# EAGLE board Fake6509_v3 (EAGLE 7.7.0)
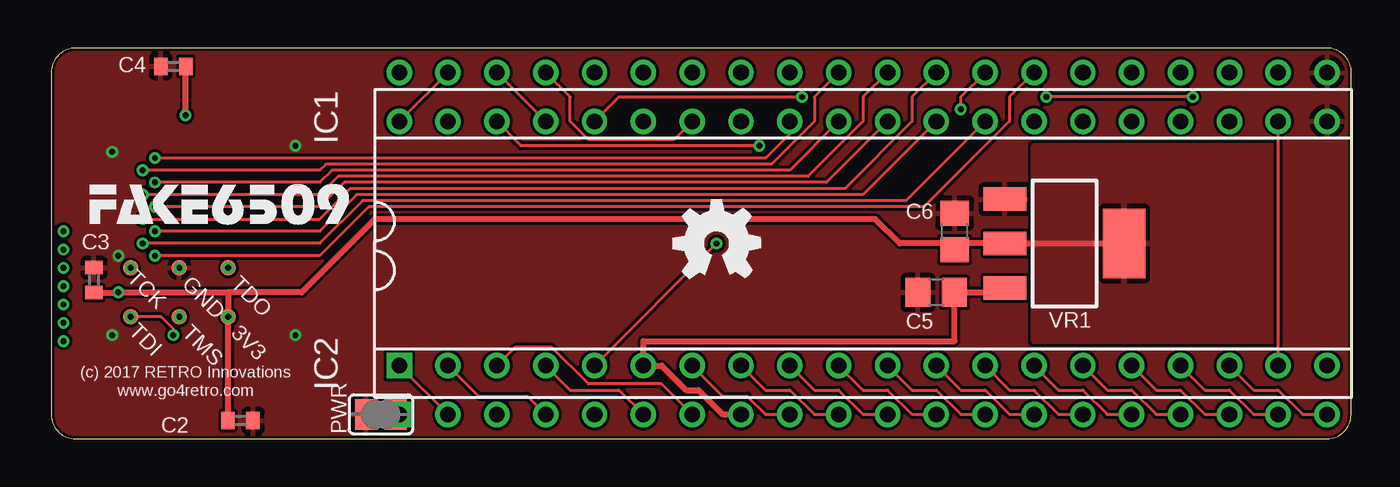
[diagram p0: board, top side]
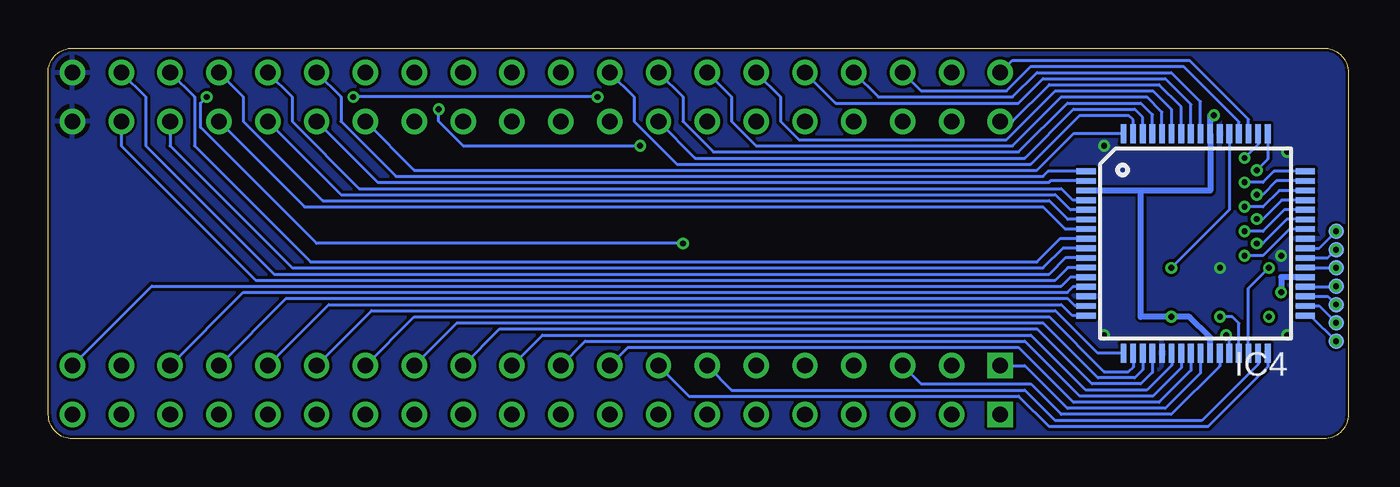
[diagram p1: board, bottom side, seen from below]

Size 67.63 x 20.32 mm. Coordinates in mm from the lower left corner, seen from the top.
Outline: 0,19.05 0,1.27 arc90 1.27,0 66.34,0 arc90 67.61,1.27 67.63,19.05 arc90 66.36,20.32 1.27,20.32 arc90 0,19.05
Copper layers (1*16): Top 0.035mm / dielectric 1.5mm / Bottom 0.035mm
Design rules "hackvana *": minimum track width 6mil, minimum drill 0.3mm, track to track 6mil, track to pad 6mil, pad to pad 6mil, via to via 6mil, smd to smd 0mil, copper to edge 6mil, drill to drill 6mil, minimum pad ring 10mil, minimum via ring 6mil, stop-mask expansion 2mil, vias tented up to drill 100mil, thermal gap 10mil

## Footprints (pad centres in the part's own frame; a part is rotated, then mirrored left to right if it is on the bottom)
TP08R = smd 0.8 x 0.8: TP 0,0
C0402 = smd 0.7 x 0.9: 1 -0.65,0; 2 0.65,0
C0805 = smd 1.3 x 1.5: 1 -0.95,0; 2 0.95,0
DIL40-ROUNDPAD = drill 0.813 square: 1 -24.13,-7.62 | drill 0.813: 2 -21.59,-7.62; 3 -19.05,-7.62; 4 -16.51,-7.62; 5 -13.97,-7.62; 6 -11.43,-7.62; 7 -8.89,-7.62; 8 -6.35,-7.62; 9 -3.81,-7.62; 10 -1.27,-7.62; 11 1.27,-7.62; 12 3.81,-7.62; 13 6.35,-7.62; 14 8.89,-7.62; 15 11.43,-7.62; 16 13.97,-7.62; 17 16.51,-7.62; 18 19.05,-7.62; 19 21.59,-7.62; 20 24.13,-7.62; 21 24.13,7.62; 22 21.59,7.62; 23 19.05,7.62; 24 16.51,7.62; 25 13.97,7.62; 26 11.43,7.62; 27 8.89,7.62; 28 6.35,7.62; 29 3.81,7.62; 30 1.27,7.62; 31 -1.27,7.62; 32 -3.81,7.62; 33 -6.35,7.62; 34 -8.89,7.62; 35 -11.43,7.62; 36 -13.97,7.62; 37 -16.51,7.62; 38 -19.05,7.62; 39 -21.59,7.62; 40 -24.13,7.62
VQFP64 = smd 1 x 0.3: 1 -5.7,3.75; 2 -5.7,3.25; 3 -5.7,2.75; 4 -5.7,2.25; 5 -5.7,1.75; 6 -5.7,1.25; 7 -5.7,0.75; 8 -5.7,0.25; 9 -5.7,-0.25; 10 -5.7,-0.75; 11 -5.7,-1.25; 12 -5.7,-1.75; 13 -5.7,-2.25; 14 -5.7,-2.75; 15 -5.7,-3.25; 16 -5.7,-3.75; 33 5.7,-3.75; 34 5.7,-3.25; 35 5.7,-2.75; 36 5.7,-2.25; 37 5.7,-1.75; 38 5.7,-1.25; 39 5.7,-0.75; 40 5.7,-0.25; 41 5.7,0.25; 42 5.7,0.75; 43 5.7,1.25; 44 5.7,1.75; 45 5.7,2.25; 46 5.7,2.75; 47 5.7,3.25; 48 5.7,3.75 | smd 0.3 x 1: 17 -3.75,-5.7; 18 -3.25,-5.7; 19 -2.75,-5.7; 20 -2.25,-5.7; 21 -1.75,-5.7; 22 -1.25,-5.7; 23 -0.75,-5.7; 24 -0.25,-5.7; 25 0.25,-5.7; 26 0.75,-5.7; 27 1.25,-5.7; 28 1.75,-5.7; 29 2.25,-5.7; 30 2.75,-5.7; 31 3.25,-5.7; 32 3.75,-5.7; 49 3.75,5.7; 50 3.25,5.7; 51 2.75,5.7; 52 2.25,5.7; 53 1.75,5.7; 54 1.25,5.7; 55 0.75,5.7; 56 0.25,5.7; 57 -0.25,5.7; 58 -0.75,5.7; 59 -1.25,5.7; 60 -1.75,5.7; 61 -2.25,5.7; 62 -2.75,5.7; 63 -3.25,5.7; 64 -3.75,5.7
SJ = smd 1.168 x 1.6: 1 -0.762,0; 2 0.762,0
SOT223 = smd 1.219 x 2.235: 1 -2.311,-3.099; 2 0,-3.099; 3 2.311,-3.099 | smd 3.6 x 2.2: 4 0,3.099

## Placement (x,y rotation side)
3V3  PTR1TP08R  [TP08R]  9.21,6.35 0 top
C2  .1  [C0402]  9.84,0.95 0 top
C3  .1  [C0402]  2.22,8.26 90 top
C4  .1  [C0402]  6.35,19.37 180 top
C5  10  [C0805]  46.04,7.62 180 top
C6  22  [C0805]  46.99,10.79 90 top
GND  PTR1TP08R  [TP08R]  6.67,8.89 0 top
GOLD_ORB_SM1  Open Source Hardware  [OSHW_5MM]  34.61,10.16 0 top
IC1  6509  [DIL40-ROUNDPAD]  42.23,11.43 0 top
IC2  65(C)02  [DIL40-ROUNDPAD]  42.23,8.89 0 top
IC4  XC9572XL  [VQFP64]  7.94,10.16 0 bottom
PWR  [SJ]  17.15,1.27 180 top
TCK  PTR1TP08R  [TP08R]  4.13,8.89 0 top
TDI  PTR1TP08R  [TP08R]  4.13,6.35 0 top
TDO  PTR1TP08R  [TP08R]  9.21,8.89 0 top
TEST0  PTR1TP08R  [TP08R]  0.64,10.79 0 bottom
TEST1  PTR1TP08R  [TP08R]  0.64,9.84 0 bottom
TEST2  PTR1TP08R  [TP08R]  0.64,8.89 0 bottom
TEST3  PTR1TP08R  [TP08R]  0.64,7.94 0 bottom
TEST4  PTR1TP08R  [TP08R]  0.64,6.99 0 bottom
TEST5  PTR1TP08R  [TP08R]  0.64,6.03 0 bottom
TEST6  PTR1TP08R  [TP08R]  0.64,5.08 0 bottom
TMS  PTR1TP08R  [TP08R]  6.67,6.35 0 top
VR1  [SOT223]  52.7,10.16 270 top

## Library data of the parts
3V3 GND TCK TDI TDO TEST0 TEST1-TEST6 TMS = testpad
C2-C6 = rcl
GOLD_ORB_SM1 = oshw
IC1 IC2 = commodore
IC4 = xilinx_xc95XXXxl
PWR = jumper
VR1 = SparkFun

## Nets
6502_A13: IC2.23 IC4.9
6502_A14: IC2.24 IC4.7
6502_A15: IC2.25 IC4.5
6502_D0: IC2.33 IC4.62
6502_D1: IC2.32 IC4.50
6502_D2: IC2.31 IC4.48
6502_D3: IC2.30 IC4.46
6502_D4: IC2.29 IC4.44
6502_D5: IC2.28 IC4.43
6502_D6: IC2.27 IC4.64
6502_D7: IC2.26 IC4.2
6502_PHI2O: IC2.39
6509_A13: IC1.20 IC4.12
6509_A14: IC1.22 IC4.10
6509_A15: IC1.23 IC4.8
6509_D0: IC1.36 IC4.57
6509_D1: IC1.35 IC4.59
6509_D2: IC1.34 IC4.60
6509_D3: IC1.33 IC4.61
6509_D4: IC1.32 IC4.63
6509_D5: IC1.31 IC4.49
6509_D6: IC1.30 IC4.47
6509_D7: IC1.29 IC4.45
6509_PHI1I: IC1.40 IC4.51
6509_PHI2I: IC1.38 IC2.37 IC4.52
!IRQ: IC1.2 IC2.4
!NMI: IC1.4 IC2.6
!RDY: IC1.1 IC2.2 IC4.25
!RESET: IC1.39 IC2.40 IC4.58
!SO: IC1.28 IC2.38
+3V3: 3V3.TP C2.1 C3.1 C4.1 C6.1 IC4.3 IC4.26 IC4.37 IC4.55 VR1.2 VR1.4
A0: IC1.7 IC2.9 IC4.31
A1: IC1.8 IC2.10 IC4.32
A2: IC1.9 IC2.11 IC4.24
A3: IC1.10 IC2.12 IC4.23
A4: IC1.11 IC2.13 IC4.22
A5: IC1.12 IC2.14 IC4.20
A6: IC1.13 IC2.15 IC4.19
A7: IC1.14 IC2.16 IC4.18
A8: IC1.15 IC2.17 IC4.17
A9: IC1.16 IC2.18 IC4.16
A10: IC1.17 IC2.19 IC4.15
A11: IC1.18 IC2.20 IC4.13
A12: IC1.19 IC2.22 IC4.11
AEC: IC1.5 IC2.36
GND: C2.2 C3.2 C4.2 C5.2 C6.2 GND.TP IC1.21 IC2.21 IC4.14 IC4.21 IC4.41 IC4.54 PWR.2 VR1.1
N$8: IC2.1 PWR.1
P0: IC1.27 IC4.42
P1: IC1.26 IC4.1
P2: IC1.25 IC4.4
P3: IC1.24 IC4.6
R/!W: IC1.37 IC2.34 IC4.56
SYNC: IC1.3 IC2.7 IC4.27
TCK: IC4.30 TCK.TP
TDI: IC4.28 TDI.TP
TDO: IC4.53 TDO.TP
TEST0: IC4.40 TEST0.TP
TEST1: IC4.39 TEST1.TP
TEST2: IC4.38 TEST2.TP
TEST3: IC4.36 TEST3.TP
TEST4: IC4.35 TEST4.TP
TEST5: IC4.34 TEST5.TP
TEST6: IC4.33 TEST6.TP
TMS: IC4.29 TMS.TP
VCC: C5.1 IC1.6 IC2.8 VR1.3

## Tracks (layer width: path | path; a pad name or v marks a point on that pad's centre or on a via)
6502_A13
  Bottom 0.152: IC2.23 61.28,15.24 54.93,8.89 15.87,8.89 14.85,9.91 IC4.9
6502_A14
  Bottom 0.152: IC2.24 54.29,12.06 15.87,12.06 14.72,10.91 IC4.7
6502_A15
  Bottom 0.152: IC2.25 52.39,12.7 15.24,12.7 14.45,11.91 IC4.5
6502_D0
  Bottom 0.152: IC2.33 33.97,14.61 16.83,14.61 14.29,17.14 11.11,17.14 10.69,16.72 IC4.62
6502_D1  (via drill 0.3)
  Top 0.152: IC2.32 38.42,15.88 37.15,14.61 v5.4,14.61
  Bottom 0.152: IC4.50 4.69,15.32 v5.4,14.61
6502_D2  (via drill 0.3)
  Top 0.152: IC2.31 38.42,13.97 14.6,13.97 13.97,13.34 v5.4,13.34
  Bottom 0.152: IC4.48 3.87,13.91 4.44,13.34 v5.4,13.34
6502_D3  (via drill 0.3)
  Top 0.152: IC2.30 40.32,13.34 15.24,13.34 13.97,12.06 v5.4,12.06
  Bottom 0.152: IC4.46 3.6,12.91 4.44,12.06 v5.4,12.06
6502_D4  (via drill 0.3)
  Top 0.152: IC2.29 42.23,12.7 15.87,12.7 13.97,10.79 v5.4,10.79
  Bottom 0.152: IC4.44 3.33,11.91 4.44,10.79 v5.4,10.79
6502_D5  (via drill 0.3)
  Top 0.152: IC2.28 44.45,12.38 16.19,12.38 13.97,10.16 v4.76,10.16
  Bottom 0.152: IC4.43 3.19,11.41 4.44,10.16 v4.76,10.16
6502_D6
  Bottom 0.152: IC2.27 48.58,13.97 16.19,13.97 14.3,15.86 IC4.64
6502_D7
  Bottom 0.152: IC2.26 50.48,13.34 15.56,13.34 15.48,13.41 IC4.2
6509_A13
  Bottom 0.152: IC1.20 62.23,7.94 14.92,7.94 14.45,8.41 IC4.12
6509_A14
  Bottom 0.152: IC1.22 62.55,17.78 62.55,15.24 55.88,8.57 15.56,8.57 14.72,9.41 IC4.10
6509_A15
  Bottom 0.152: IC1.23 60.01,17.78 60.01,15.24 53.97,9.21 16.19,9.21 14.99,10.41 IC4.8
6509_D0
  Bottom 0.152: IC1.36 26.67,17.46 17.15,17.46 15.87,18.73 9.53,18.73 8.19,17.39 IC4.57
6509_D1
  Bottom 0.152: IC1.35 29.53,17.78 29.53,16.51 28.58,15.56 17.78,15.56 15.24,18.1 10.16,18.1 9.19,17.12 IC4.59
6509_D2
  Bottom 0.152: IC1.34 32.07,17.78 32.07,16.51 30.8,15.24 17.46,15.24 14.92,17.78 10.48,17.78 9.69,16.99 IC4.60
6509_D3
  Bottom 0.152: IC1.33 34.61,17.78 34.61,16.51 33.02,14.92 17.15,14.92 14.6,17.46 10.8,17.46 10.19,16.86 IC4.61
6509_D4
  Bottom 0.152: IC1.32 37.15,17.78 37.15,16.51 34.93,14.29 16.51,14.29 13.97,16.83 11.43,16.83 11.19,16.59 IC4.63
6509_D5  (via drill 0.3)
  Top 0.152: IC1.31 39.69,17.78 39.69,16.51 37.46,14.29 14.29,14.29 13.97,13.97 v4.76,13.97
  Bottom 0.152: IC4.49 4.19,14.54 v4.76,13.97
6509_D6  (via drill 0.3)
  Top 0.152: IC1.30 42.23,17.78 42.23,16.51 39.37,13.65 14.92,13.65 13.97,12.7 v4.76,12.7
  Bottom 0.152: IC4.47 3.74,13.41 4.44,12.7 v4.76,12.7
6509_D7  (via drill 0.3)
  Top 0.152: IC1.29 44.77,17.78 44.77,16.51 41.28,13.02 15.56,13.02 13.97,11.43 v4.76,11.43
  Bottom 0.152: IC4.45 3.47,12.41 4.44,11.43 v4.76,11.43
6509_PHI1I
  Bottom 0.152: IC1.40 17.46,19.69 8.26,19.69 5.19,16.62 IC4.51
6509_PHI2I
  Top 0.152: IC1.38 IC2.37
  Bottom 0.152: IC1.38 22.22,18.1 17.78,18.1 16.51,19.37 8.57,19.37 5.69,16.48 IC4.52
!IRQ
  Top 0.152: IC1.2 22.22,2.22 24.77,2.22 IC2.4
!NMI
  Top 0.152: IC1.4 26.99,2.54 29.53,2.54 IC2.6
!RDY
  Top 0.152: IC1.1 IC2.2
  Bottom 0.152: IC1.1 16.83,3.81 14.6,1.59 9.53,1.59 7.69,3.42 IC4.25
!RESET
  Top 0.152: IC1.39 IC2.40
  Bottom 0.152: IC2.40 17.46,16.51 15.56,18.41 9.84,18.41 8.69,17.26 IC4.58
!SO  (via drill 0.3)
  Top 0.152: v36.83,15.24 24.45,15.24 IC2.38 | v47.31,17.14 47.31,17.78 IC1.28
  Bottom 0.152: v36.83,15.24 46.04,15.24 47.31,16.51 v47.31,17.14
+3V3  (via drill 0.3)
  Top 0.305: 9.21,7.62 v3.49,7.62 3.49,7.61 C3.1 | 9.21,7.62 3V3.TP C2.1 | v6.99,16.83 6.99,19.37 C4.1 | VR1.4 VR1.2 46.99,10.16 | 9.21,7.62 13.02,7.62 16.83,11.43 42.86,11.43 44.13,10.16 46.99,10.16 | 46.99,10.16 C6.1
  Bottom 0.305: IC4.37 3.49,8.41 v3.49,7.62 | 10.8,12.91 7.19,12.91 IC4.55 7.19,16.83 v6.99,16.83 | 10.8,12.91 IC4.3 | 10.8,12.91 10.8,6.35 3V3.TP 8.26,6.35 7.19,5.28 IC4.26
  other vias: 9.21,6.35
  pour Top: 51.12,15.24 63.5,15.24 63.5,5.08 51.12,5.08
A0
  Top 0.152: IC1.7 34.93,2.22 36.19,2.22 37.15,1.27 IC2.9
  Bottom 0.152: IC1.7 32.07,2.54 16.83,2.54 15.24,0.95 7.62,0.95 4.69,3.88 IC4.31
A1
  Top 0.152: IC1.8 37.15,2.54 38.42,2.54 39.69,1.27 IC2.10
  Bottom 0.152: IC1.8 34.29,2.22 17.15,2.22 15.56,0.63 7.3,0.63 4.19,3.75 IC4.32
A2
  Top 0.152: IC1.9 39.69,2.54 40.96,2.54 42.23,1.27 IC2.11
  Bottom 0.152: IC1.9 37.46,4.76 17.15,4.76 14.29,1.9 9.84,1.9 8.19,3.56 IC4.24
A3
  Top 0.152: IC1.10 42.23,2.54 43.5,2.54 44.77,1.27 IC2.12
  Bottom 0.152: IC1.10 39.69,5.08 16.83,5.08 13.97,2.22 10.16,2.22 8.69,3.7 IC4.23
A4
  Top 0.152: IC1.11 44.77,2.54 46.04,2.54 47.31,1.27 IC2.13
  Bottom 0.152: IC1.11 41.91,5.4 16.51,5.4 13.65,2.54 10.48,2.54 9.19,3.83 IC4.22
A5
  Top 0.152: IC1.12 47.31,2.54 48.58,2.54 49.85,1.27 IC2.14
  Bottom 0.152: IC1.12 44.13,5.71 16.19,5.71 13.33,2.86 10.8,2.86 10.19,3.46 IC4.20
A6
  Top 0.152: IC1.13 49.85,2.54 51.12,2.54 52.39,1.27 IC2.15
  Bottom 0.152: IC1.13 46.36,6.03 15.87,6.03 13.02,3.17 11.11,3.17 10.69,3.6 IC4.19
A7
  Top 0.152: IC1.14 52.39,2.54 53.66,2.54 54.93,1.27 IC2.16
  Bottom 0.152: IC1.14 48.58,6.35 15.56,6.35 12.7,3.49 11.43,3.49 11.19,3.74 IC4.18
A8
  Top 0.152: IC1.15 54.93,2.54 56.2,2.54 57.47,1.27 IC2.17
  Bottom 0.152: IC1.15 50.8,6.67 15.24,6.67 13.03,4.46 IC4.17
A9
  Top 0.152: IC1.16 57.47,2.54 58.74,2.54 60.01,1.27 IC2.18
  Bottom 0.152: IC1.16 53.02,6.99 14.92,6.99 14.35,6.41 IC4.16
A10
  Top 0.152: IC1.17 60.01,2.54 61.28,2.54 62.55,1.27 IC2.19
  Bottom 0.152: IC1.17 55.24,7.3 14.6,7.3 14.21,6.91 IC4.15
A11
  Top 0.152: IC1.18 62.55,2.54 63.82,2.54 65.09,1.27 IC2.20
  Bottom 0.152: IC1.18 57.47,7.62 14.6,7.62 14.31,7.91 IC4.13
A12
  Top 0.152: IC1.19 IC2.22
  Bottom 0.152: IC2.22 63.82,15.24 56.83,8.26 15.24,8.26 14.58,8.91 IC4.11
AEC  (via drill 0.3)
  Top 0.152: IC2.36 29.53,17.78 v39.05,17.78 | IC1.5 v34.61,10.16 | v59.37,17.78 v51.75,17.78
  Bottom 0.152: v34.61,10.16 53.66,10.16 59.69,16.19 59.69,17.46 v59.37,17.78 | v39.05,17.78 v51.75,17.78
GND  (via drill 0.3)
  other vias: 6.67,8.89 12.7,5.4 3.18,5.4 3.18,14.92 12.7,15.24 3.49,9.53
  pour Top (rank 2): 1.27,20.32 66.36,20.32 arc-90 67.63,19.05 67.63,1.27 arc-90 66.36,0 1.27,0 arc-90 0,1.27 0,19.05 arc-90
  pour Bottom (rank 2): 1.27,20.32 66.36,20.32 arc-90 67.63,19.05 67.63,1.27 arc-90 66.36,0 1.27,0 arc-90 0,1.27 0,19.05 arc-90
N$8
  Top 0.152: PWR.1 IC2.1
P0  (via drill 0.3)
  Top 0.152: IC1.27 49.85,17.78 49.85,16.51 45.4,12.06 16.51,12.06 13.97,9.53 v5.4,9.53
  Bottom 0.152: IC4.42 3.06,10.91 4.44,9.53 v5.4,9.53
P1
  Bottom 0.152: IC1.26 52.39,17.78 52.39,16.51 49.53,13.65 15.87,13.65 15.62,13.91 IC4.1
P2
  Bottom 0.152: IC1.25 54.93,17.78 54.93,16.51 51.44,13.02 14.92,13.02 14.31,12.41 IC4.4
P3
  Bottom 0.152: IC1.24 57.47,17.78 57.47,16.51 53.34,12.38 15.56,12.38 14.58,11.41 IC4.6
R/!W
  Top 0.152: IC2.34 32.38,15.56 27.94,15.56 26.99,16.51 26.99,17.78 IC1.37
  Bottom 0.152: IC1.37 24.45,17.78 17.46,17.78 16.19,19.05 9.21,19.05 7.69,17.53 IC4.56
SYNC
  Top 0.152: IC2.7 31.75,2.86 27.94,2.86 26.04,4.76 24.13,4.76 IC1.3
  Bottom 0.152: IC1.3 22.22,2.86 16.51,2.86 14.92,1.27 9.21,1.27 6.69,3.79 IC4.27
TCK  (via drill 0.3)
  Bottom 0.152: IC4.30 5.19,7.83 TCK.TP
  other vias: 4.13,8.89
TDI  (via drill 0.3)
  Top 0.152: v6.35,5.4 6.35,5.71 5.72,6.35 TDI.TP
  Bottom 0.152: IC4.28 6.19,5.24 v6.35,5.4
  other vias: 4.13,6.35
TDO  (via drill 0.3)
  Bottom 0.152: IC4.53 6.19,11.91 TDO.TP
  other vias: 9.21,8.89
TEST0  (via drill 0.3)
  Bottom 0.152: IC4.40 1.52,9.91 TEST0.TP
  other vias: 0.64,10.79
TEST1  (via drill 0.3)
  Bottom 0.152: IC4.39 1.07,9.41 TEST1.TP
  other vias: 0.64,9.84
TEST2  (via drill 0.3)
  Bottom 0.152: IC4.38 0.65,8.91 TEST2.TP
  other vias: 0.64,8.89
TEST3  (via drill 0.3)
  Bottom 0.152: IC4.36 0.66,7.91 TEST3.TP
  other vias: 0.64,7.94
TEST4  (via drill 0.3)
  Bottom 0.152: IC4.35 1.06,7.41 TEST4.TP
  other vias: 0.64,6.99
TEST5  (via drill 0.3)
  Bottom 0.152: IC4.34 1.51,6.91 TEST5.TP
  other vias: 0.64,6.03
TEST6  (via drill 0.3)
  Bottom 0.152: IC4.33 1.97,6.41 TEST6.TP
  other vias: 0.64,5.08
TMS  (via drill 0.3)
  Bottom 0.152: IC4.29 5.69,6 6.03,6.35 TMS.TP
  other vias: 6.67,6.35
VCC
  Top 0.305: IC2.8 34.93,1.27 33.65,2.54 33.02,2.54 31.75,3.81 IC1.6 30.8,5.08 46.99,5.08 C5.1 49.61,7.62 VR1.3

## Text on the board
tNames: (c) 2017 RETRO Innovations | www.go4retro.com